# Altium PCB IIM-42652_breakout.PcbDoc
Units mm, origin at the board's own origin, x right, y up, seen from the top; angles counter-clockwise.
Board outline 15 x 10 mm, 4 copper layers (Top Layer, L2, L3, Bottom Layer), stack 1.57 mm thick; 14 components, 8 nets, 33 pads, 16 vias.
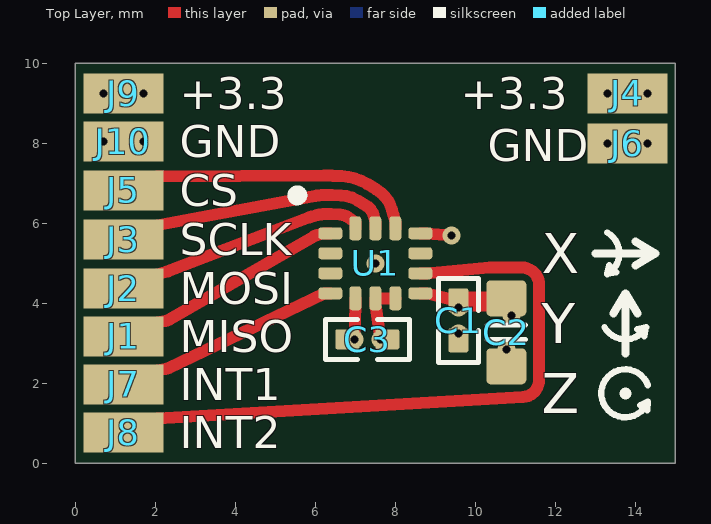
[diagram p0: Top Layer view]
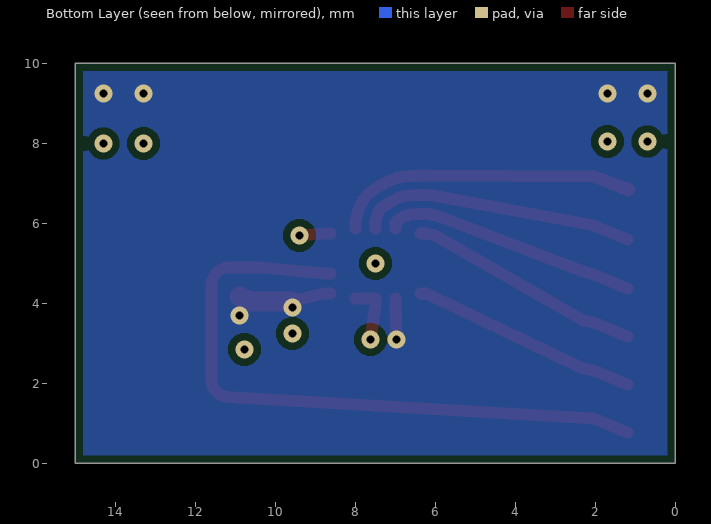
[diagram p1: Bottom Layer view, seen from below]
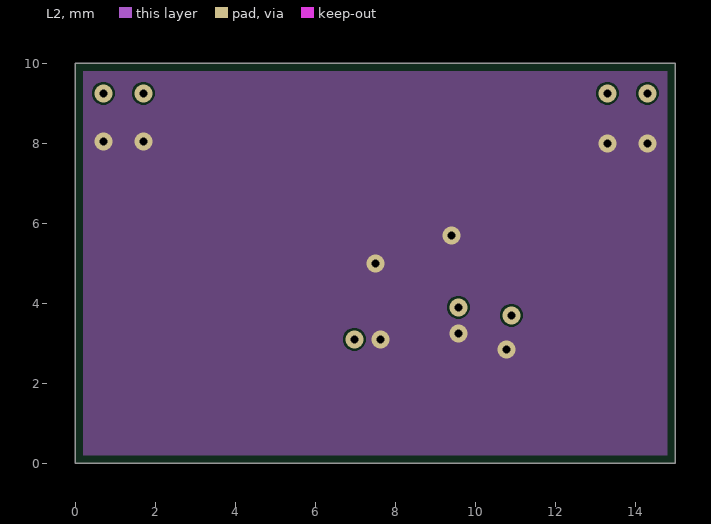
[diagram p2: L2]
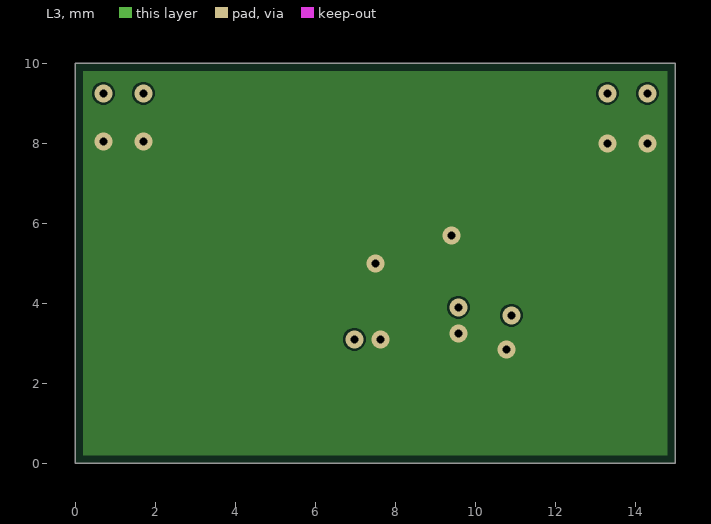
[diagram p3: L3]
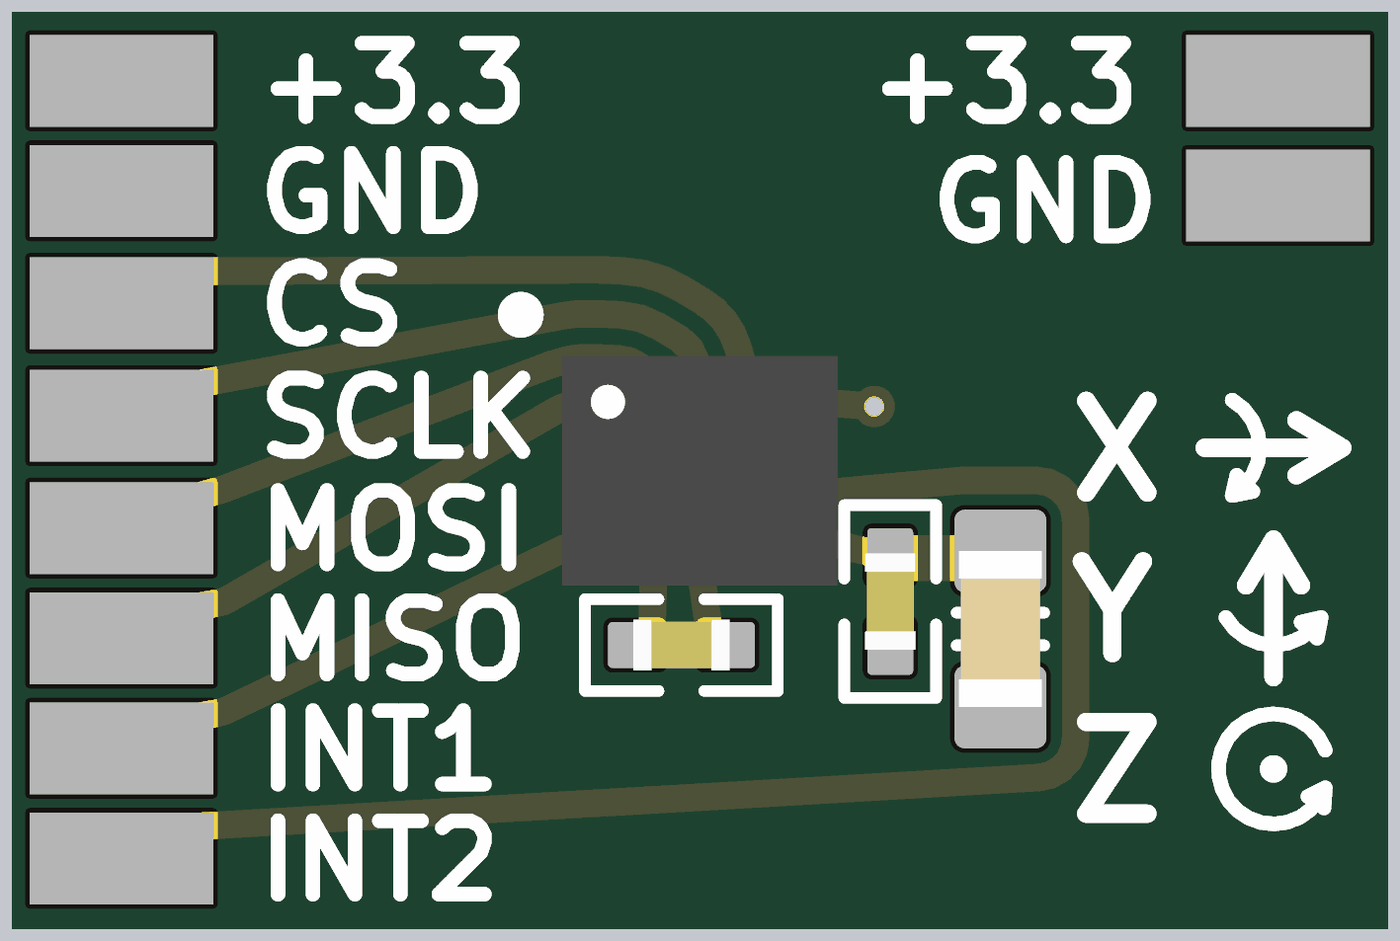
[diagram p4: 3D render of the assembled board from above, using the file's embedded part models]

## Layer stack, top to bottom
Top Solder: solder mask 0.0127, Solder Resist, Dk 3.5
Top Layer: signal copper 0.035
Dielectric 2: prepreg 0.2, PP-017, Dk 4.05
L2: signal copper 0.0175
Dielectric 1: core 1.065, Core-042, Dk 4.05
L3: signal copper 0.0175
Dielectric 3: prepreg 0.2, PP-017, Dk 4.05
Bottom Layer: signal copper 0.035
Bottom Solder: solder mask 0.0127, Solder Resist, Dk 3.5

## Board outline
0,0 15,0 15,10 0,10

## Design rules (kind name [scope] priority, off if disabled: settings)
BoardOutlineClearance [All] p1: gap=0.2 ignorepadtopadclearanceinfootprint=FALSE except(0: Arc-SplitContinuation Track-SplitContinuation SMDPad-SplitContinuation THPad-SplitContinuation Via-SplitContinuation Fill-SplitContinuation Poly-SplitContinuation Region-SplitContinuation Text-SplitContinuation)
Clearance [All] p1: gap=0.18 ignorepadtopadclearanceinfootprint=TRUE except(0: Arc-Hole Track-Hole SMDPad-Hole THPad-Hole Via-Hole Fill-Hole Poly-Hole Region-Hole Text-Hole; 0.17: Arc-SMDPad Track-SMDPad)
ComponentClearance [All] p1: gap=0.05 collisioncheckmode=3 verticalgap=0.1 showdistances=FALSE
HoleSize [All] p1: absolutevalues=TRUE maxlimit=3 minlimit=0.2 maxpercent=80.000 minpercent=20.000
HoleToHoleClearance [All] p1: gap=0.2 allowstackedmicrovias=TRUE
MinimumSolderMaskSliver [All] p1: minsoldermaskwidth=0.2
PlaneClearance [All] p1: clearance=0.5
PolygonConnect PolygonConnectVia [IsVia] p1: connectstyle=Direct reliefconductorwidth=0.2 reliefentries=4 polygonreliefangle="90 Angle" airgapwidth=0.2
PolygonConnect [All] p2: connectstyle=Direct reliefconductorwidth=0.2 reliefentries=4 polygonreliefangle="90 Angle" airgapwidth=0.2
RoomDefinition IIM-42652_breakout [InComponentClass('IIM-42652_breakout')] p1: confinementstyle=ConfineIn formatcopy=TRUE lockcomponents=FALSE outline -50,-39 101,-39 101,110 -50,110
RoutingVias [All] p1: holewidth=0.2 width=0.45 viastyle="Through Hole" minholewidth=0.2 minwidth=0.45 maxholewidth=3 maxwidth=5
SilkToSilkClearance [All] p1: silktosilkclearance=0.2
SilkToSolderMaskClearance [IsPad] p1: minsilkscreentomaskgap=0.2 clearancetoexposedcopper=TRUE
SolderMaskExpansion SolderMaskExpansionVia [IsVia] p1: expansion=0.05 istentingtop=TRUE
SolderMaskExpansion [All] p2: expansion=0.05 istentingtop=FALSE
Width [All] p1: maxlimit=5 minlimit=0.2 preferedwidth=0.2
23 further rules are at their usual default settings.

## Components (designator, comment, footprint, x,y, rotation, side; value= is the part's Value field where it differs from the comment)
C1 "100n" CAPC1005X55N 9.575,3.575 r270 top
C2 "approved sub OK" CAPC1608X90N 10.775,3.275 r270 top value=4.7u
C3 "10n" CAPC1005X55N 7.3,3.1 r0 top
J1 "MISO" PAD-1020 1.2,3.175 r90 top
J2 "MOSI" PAD-1020 1.2,4.375 r270 top
J3 "SCLK" PAD-1020 1.2,5.6 r90 top
J4 "+3.3" PAD-1020 13.8,9.25 r90 top
J5 "CS" PAD-1020 1.2,6.825 r90 top
J6 "GND" PAD-1020 13.8,8 r90 top
J7 "INT1" PAD-1020 1.2,1.975 r270 top
J8 "INT2" PAD-1020 1.2,0.775 r90 top
J9 "+3.3" PAD-1020 1.2,9.25 r90 top
J10 "GND" PAD-1020 1.2,8.05 r90 top
U1 "IIM-42652" IIM-42652_LGA14 7.5,5 r0 top

## Footprints (in the part's own frame and the unit in brackets; to place one, negate y for a bottom-side part, rotate by r counter-clockwise, add the part's x,y. Pads: shape width x height; smd on the part's side, far side on the other; paste and mask are expansions set on the pad)
CAPC1005X55N [mm] "Chip Capacitor, Body 1.0x0.5mm, EIA 0402, IPC Medium Density"
  round 0.2 on Mech15: 0(0,0)
  rrect20% 0.6x0.5 smd: 1(-0.5,0) 2(0.5,0)
  Top Layer pour cut-out: -0.325,0.375 -0.2,0.5 0.2,0.5 0.325,0.375 0.325,-0.375 0.2,-0.5 -0.2,-0.5 -0.325,-0.375
  silkscreen extent -1.05,-0.5 1.05,0.5, body extent -0.52,-0.27 0.53,0.28, height 0.55
CAPC1608X90N [mm] "Chip Capacitor, Body 1.6x0.8mm, EIA 0603, IPC Medium Density"
  round 0.254 on Mech15: 0(0,0)
  rrect25% 0.9x1 smd: 1(-0.85,0) 2(0.85,0)
  Top Layer pour cut-out: -0.6,0.5 -0.4,0.7 0.4,0.7 0.6,0.5 0.6,-0.5 0.4,-0.7 -0.4,-0.7 -0.6,-0.5
  silkscreen extent -0.18,-0.48 0.18,0.48, body extent -0.85,-0.45 0.85,0.45, height 0.89
IIM-42652_LGA14 [mm] "PQFN, 14-Leads, Body 3,00x2,50mm, Pitch 0,50mm, IPC Medium Density"
  rrect50% 0.6x0.3 smd: 1(-1.125,0.75) 2(-1.125,0.25) 3(-1.125,-0.25) 4(-1.125,-0.75) 8(1.125,-0.75) 9(1.125,-0.25) 10(1.125,0.25) 11(1.125,0.75)
  rrect50% 0.3x0.6 smd: 5(-0.5,-0.875) 6(0,-0.875) 7(0.5,-0.875) 12(0.5,0.875) 13(0,0.875) 14(-0.5,0.875)
  silkscreen extent -2.07,1.58 -1.82,1.82, body extent -1.5,-1.25 1.5,1.25, height 0.97
PAD-1020 [mm]
  rect 1x2 smd: 1(0,0)

## Part data
C1: library part CAPC_100n_0402_X5R_16V_10%, "Capacitor SMD Cer 100nF 10% 16V X5R 0402", Manufacturer 1="AVX Corporation", Manufacturer 2=Yageo, Manufacturer Part Number 1=0402YD104KAT2A, Manufacturer Part Number 2=CC0402KRX5R7BB104, Operating Temperature="-55°C ~ 125°C", Package / Case="0402 (1005 Metric)", Ratings="16V; X5R", Supplier Part Number 1=478-1126-1-ND, Tolerance=±10%, ComponentLink1Description=http://www.avx.com/docs/Catalogs/cx5r.pdf, ComponentLink1URL=http://www.avx.com/docs/Catalogs/cx5r.pdf, ComponentLink2Description=http://www.yageo.com/documents/recent/UPY-GPHC_X5R_4V-to-50V_12.pdf, ComponentLink2URL=http://www.yageo.com/documents/recent/UPY-GPHC_X5R_4V-to-50V_12.pdf, SCDType=spec, Size / Dimension="0.039\" L x 0.020\" W (1.00mm x 0.50mm)", Supplier 1=Digi-Key, Supplier 2=Digi-Key, Supplier Part Number 2=311-1347-1-ND
C2: library part CAPC_2u2_0603_10V_10%, "Capacitor SMD Cer 2.2uF 10% 10V X5R 0603", Manufacturer 1="AVX Corporation", Manufacturer Part Number 1=0603ZD225KAT2A, Package / Case="0603 (1608 metric)", Ratings="10V; X5R", Supplier Part Number 1=478-6212-1-ND, Tolerance=±10%, ComponentLink1Description=http://www.avx.com/docs/Catalogs/cx5r.pdf, ComponentLink1URL=http://www.avx.com/docs/Catalogs/cx5r.pdf, Material=ceramic, SCDType=spec, Supplier 1=Digi-Key
C3: library part CAPC_10n_0402_X7R_16V_10%, "Capacitor SMD Cer 10nF 10% 16V X7R 0402", Manufacturer 1="AVX Corporation", Manufacturer 2=Yageo, Manufacturer Part Number 1=0402YC103KAT2A, Manufacturer Part Number 2=CC0402KRX7R7BB103, Operating Temperature="-55°C ~ 125°C", Package / Case="0402 (1005 Metric)", Ratings="16V; X7R", Supplier Part Number 1=478-1114-1-ND, Tolerance=±10%, ComponentLink1Description=http://www.avx.com/docs/Catalogs/cx7r.pdf, ComponentLink1URL=http://www.avx.com/docs/Catalogs/cx7r.pdf, ComponentLink2Description=http://www.yageo.com/documents/recent/UPY-GPHC_X7R_6.3V-to-50V_8.pdf, ComponentLink2URL=http://www.yageo.com/documents/recent/UPY-GPHC_X7R_6.3V-to-50V_8.pdf, SCDType=spec, Size / Dimension="0.039\" L x 0.020\" W (1.00mm x 0.50mm)", Supplier 1=Digi-Key, Supplier 2=Digi-Key, Supplier Part Number 2=311-1042-1-ND
J1 J2 J3 J4 J5 J6 J7 J8 J9 J10: library part SOLDER-PAD

## Via types
v1: diameter 0.45, hole 0.2, Top Layer to Bottom Layer, tented both sides, 16 vias

## Nets (pads, with @x,y where several pads share a name; then routed paths per layer and width w, separated by ;. In a path a pad name is that pad's centre, name@x,y a point inside that pad or via, vN(x,y) a via of type N, cw(c..) or ccw(c..) an arc to the next point about the centre after c; other vN are vias at no path point)
+3.3: C1.1 C2.1 C3.1 J4.1 J9.1 U1.5 U1.8 | length 3.4
  Top Layer w0.3: C3.1@6.974,3.115 v1(6.975,3.1) 7,3.975 U1.5 ; U1.8 8.775,4.25 C1.1@9.56,4.06 ; C1.1@9.535,3.91 v1(9.575,3.9)
  Top Layer w0.5: C1.1@9.6,4.05 10.65,4.05 10.71,4.08 C2.1@10.9,4.175
  other v1: 10.9,3.7 0.7,9.25 1.7,9.25 13.3,9.25 14.3,9.25
CS: J5.1 U1.12 | length 8.6
  Top Layer w0.3: J5.1@1.15,6.85 1.186,6.863 J5.1@2.05,7.175 ; J5.1 J5.1@2.05,7.175 ; U1.12 8,6.025 7.959,6.194 ccw(c7.575,6.1) 7.954,6.212 7.915,6.343 ccw(c7.075,6.1) 7.525,6.851 ccw(c7.075,6.1) 7.523,6.852 7.298,6.986 ccw(c6.6,5.825) 6.661,7.179 6.519,7.185 6.441,7.188 ccw(c6.375,5.75) 6.388,7.19 ccw(c6.375,5.75) 6.375,7.19 6.225,7.19 ccw(c6.225,5.75) 6.217,7.19 J5.1@2.05,7.175
GND: C1.2 C2.2 C3.2 J6.1 J10.1 U1.6 U1.7 U1.11 | length 2.3
  Top Layer w0.3: v1(7.625,3.1) 7.5,3.975 U1.6 U1.7 ; U1.11 8.775,5.75 v1(9.4,5.7)
  other v1: 10.775,2.85 9.575,3.245 7.5,5 13.3,8 14.3,8 0.7,8.05 1.7,8.05
INT1: J7.1 U1.4 | length 5.7
  Top Layer w0.3: J7.1 2.05,2.325 2.253,2.36 ccw(c2.2,2.675) 2.338,2.386 6.225,4.25 U1.4
INT2: J8.1 U1.9 | length 16.3
  Top Layer w0.3: J8.1 2.05,1.125 11.188,1.656 ccw(c11.163,2.087) 11.595,2.087 11.595,4.463 ccw(c11.163,4.463) 11.163,4.895 10.387,4.895 ccw(c10.387,4.463) 10.348,4.893 8.775,4.75 U1.9
MISO: J1.1 U1.1 | length 5.8
  Top Layer w0.3: J1.1 2.05,3.525 2.254,3.56 ccw(c2.2,3.875) 2.36,3.598 5.953,5.667 cw(c6.15,5.325) 6.056,5.709 6.225,5.75 U1.1
MOSI: J2.1 U1.14 | length 6.3
  Top Layer w0.3: J2.1 2.05,4.725 2.287,4.792 ccw(c2.2,5.1) 2.313,4.801 5.839,6.143 cw(c6.15,5.325) 5.905,6.165 6.039,6.204 cw(c6.15,5.825) 6.093,6.216 6.156,6.225 cw(c6.225,5.75) 6.225,6.23 6.375,6.23 cw(c6.375,5.75) 6.396,6.23 6.618,6.22 cw(c6.6,5.825) 6.829,6.147 7,6.025 U1.14
SCLK: J3.1 U1.13 | length 6.9
  Top Layer w0.3: J3.1 2.05,5.95 5.989,6.685 cw(c6.15,5.825) 6.024,6.691 6.087,6.7 cw(c6.225,5.75) 6.225,6.71 6.375,6.71 cw(c6.375,5.75) 6.418,6.709 6.639,6.699 cw(c6.6,5.825) 7.05,6.576 7.278,6.439 cw(c7.075,6.1) 7.459,6.194 7.5,6.025 U1.13
pads on no net: C1.0 C2.0 C3.0 U1.2 U1.3 U1.10

## Polygon pours and split planes (outlines as drawn)
GND on L2 "GND_L02_P000" (solid, pour order 0): 0,0 16,0 16,10 0,10
GND on L3 "GND_L03_P001" (solid, pour order 1): 0,0 16,0 16,10 0,10
+3.3 on Bottom Layer "+3.3_L04_P002" (solid, pour order 2): 0,0 16,0 16,10 0,10

## Silkscreen, mask and mechanical layers (free items; w line width, h text height)
Top Overlay:
  circle w0.3: c13.75,1.75 r0
  lines w0.16: 13.23,3.4 ccw(c13.75,3.7) 14.27,3.4 ; 13.3,5.77 cw(c13,5.25) 13.3,4.73 ; 14.314,1.955 ccw(c13.75,1.75) 14.314,1.545 ; 13.3,4.73 13.35,4.95 13.525,4.775 13.3,4.73 ; 14.27,3.4 14.05,3.35 14.225,3.175 14.27,3.4 ; 14.314,1.545 14.125,1.45 14.3,1.325 14.314,1.545
  lines w0.2: 13,5.25 14.5,5.25 ; 13.45,3.75 13.75,4.25 ; 13.75,2.75 13.75,4.25 ; 14,4.95 14.5,5.25 ; 14,5.55 14.5,5.25 ; 14.05,3.75 13.75,4.25
  text "X" at 11.667,4.75 h1
  text "Y" at 11.667,3 h1
  text "Z" at 11.667,1.25 h1
Mechanical 1:
  the board outline again, w0.1